# Altium PCB ECEN4720_brd1_2020-09-11.PcbDoc
Units mil, origin at the board's own origin, x right, y up, seen from the top; angles counter-clockwise.
Board outline 3500 x 2000 mil, 2 copper layers (Top Layer, Bottom Layer), stack 61.756 mil thick; 37 components, 23 nets, 95 pads, 26 vias.
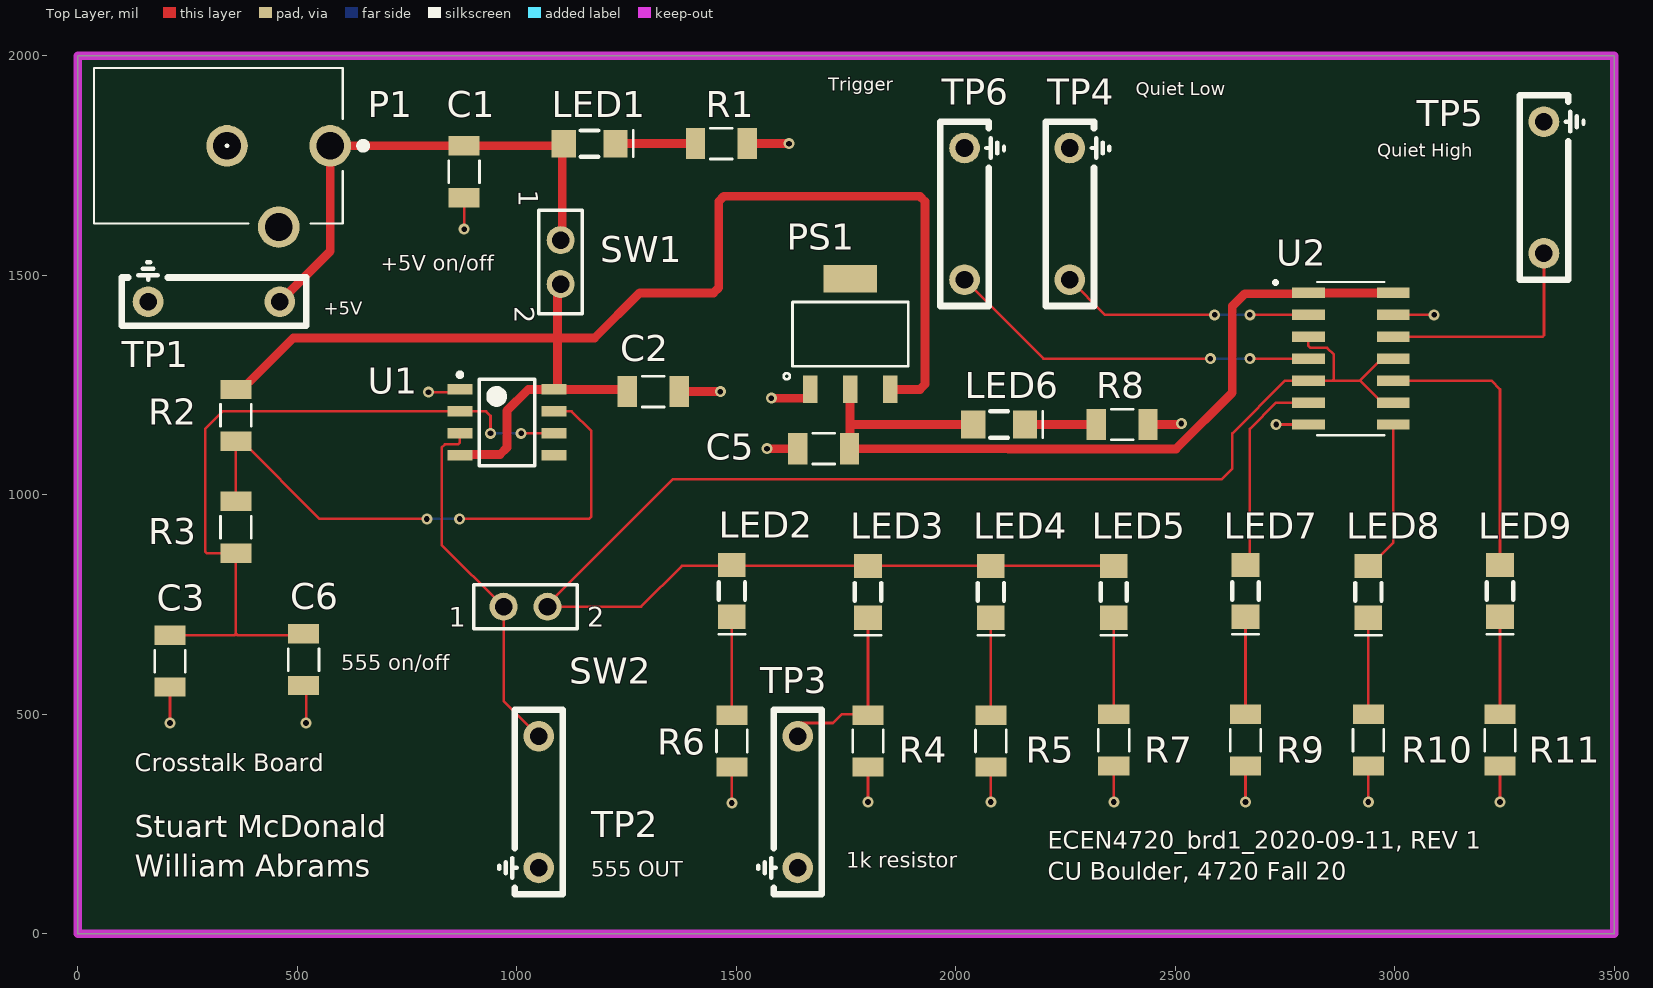
[diagram p0: Top Layer view]
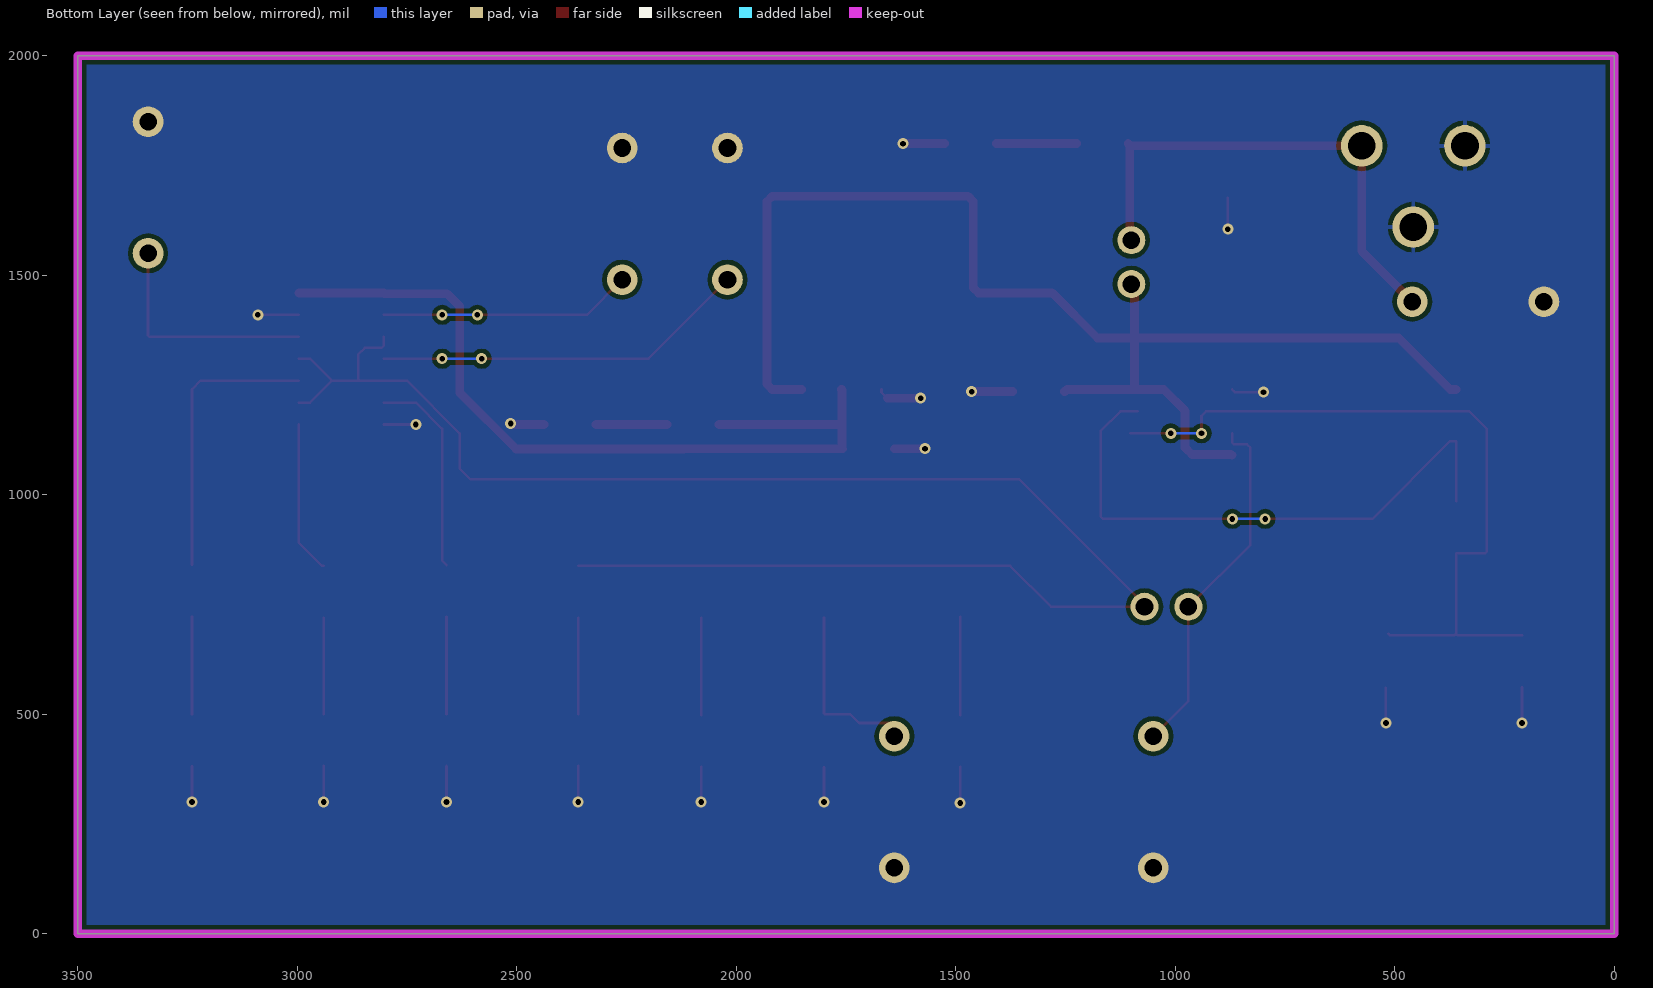
[diagram p1: Bottom Layer view, seen from below]

## Layer stack, top to bottom
Top Solder: solder mask 1, SM-001, Dk 4
Top Layer: signal copper 1.378
Dielectric 1: core 59, Core-043, Dk 4.3
Bottom Layer: signal copper 1.378
Bottom Solder: solder mask 1, SM-001, Dk 4

## Board outline
0,0 3500,0 3500,2000 0,2000

## Design rules (kind name [scope] priority, off if disabled: settings)
Clearance [All] p1: gap=10 ignorepadtopadclearanceinfootprint=FALSE except(0: Arc-Hole Track-Hole SMDPad-Hole THPad-Hole Via-Hole Fill-Hole Poly-Hole Region-Hole Text-Hole)
PlaneClearance [All] p1: clearance=10
PlaneConnect [All] p1: planeconnectstyle=Direct reliefexpansion=20 reliefentries=4 reliefconductorwidth=10 reliefairgap=10
PolygonConnect [All] p1: connectstyle=Direct reliefconductorwidth=10 reliefentries=4 polygonreliefangle="90 Angle" airgapwidth=10
RoutingVias [All] p1: holewidth=13 width=25 viastyle="Through Hole" minholewidth=13 minwidth=25 maxholewidth=60 maxwidth=80
SolderMaskExpansion [All] p1: expansion=4 istentingtop=FALSE
UnRoutedNet [All] p1: checkbadconnections=TRUE
Width "Schematic Width Constraint_2" [InNet('LDO_3.3V')] p1: maxlimit=100 minlimit=10 preferedwidth=20 minimp=50.000000 maximp=50.000000 favimp=50.000000
Width "Schematic Width Constraint_1" [InNet('+5')] p2: maxlimit=100 minlimit=10 preferedwidth=20 minimp=50.000000 maximp=50.000000 favimp=50.000000
Width "Schematic Width Constraint" [InNet('555_5v')] p3: maxlimit=100 minlimit=10 preferedwidth=20 minimp=50.000000 maximp=50.000000 favimp=50.000000
Width [All] p4: maxlimit=100 minlimit=6 preferedwidth=6 minimp=50.000000 maximp=50.000000 favimp=50.000000
27 further rules are at their usual default settings.

## Components (designator, comment, footprint, x,y, rotation, side; value= is the part's Value field where it differs from the comment)
C1 "22pF" 1206_Passive 880,1795 r270 top
C2 "22pF" 1206_Passive 1370,1235 r180 top
C3 "50nF" 1206_Passive 210,562 r90 top
C5 "22uF" 1206_Passive 1640,1105 r0 top
C6 "50nF" 1206_Passive 514.49,565.51 r90 top
LED1 "LTST-C150CKT" LED 1225,1800 r270 top value=Red
LED2 "LTST-C150CKT" LED 1490,722 r180 top value=Red
LED3 "LTST-C150CKT" LED 1800,720 r180 top value=Red
LED4 "LTST-C150CKT" LED 2080,720 r180 top value=Red
LED5 "LTST-C150CKT" LED 2360,720 r180 top value=Red
LED6 "LTST-C150CKT" LED 2158,1160 r270 top value=Red
LED7 "LTST-C150CKT" LED 2660,722 r180 top value=Red
LED8 "LTST-C150CKT" LED 2940,720 r180 top value=Red
LED9 "LTST-C150CKT" LED 3240,722 r180 top value=Red
P1 "Power Jack" Power_Jack 575,1795 r180 top value="CONN PWR JACK 2X5.5MM SOLDER"
PS1 "AZ1117CH-3.3TRG1" LDO 1760,1365 r180 top value="IC REG LINEAR 3.3V 800MA SOT223"
R1 "1k" 1206_Passive 1525,1800 r180 top value="1K Ohm"
R2 "10k" 1206_Passive 360,1122 r90 top value=10KOhm
R3 "10k" 1206_Passive 360,867 r90 top value=10KOhm
R4 "1k" 1206_Passive 1800,380 r90 top value="1K Ohm"
R5 "300" 1206_Passive 2080,380 r90 top value=300Ohm
R6 "1M" 1206_Passive 1490,380 r90 top value="10k Ohm"
R7 "1M" 1206_Passive 2360,382 r90 top value=50
R8 "1k" 1206_Passive 2438,1160 r180 top value="1K Ohm"
R9 "50" 1206_Passive 2660,382 r90 top value=50Ohm
R10 "50" 1206_Passive 2940,382 r90 top value=50Ohm
R11 "50" 1206_Passive 3240,382 r90 top value=50Ohm
SW1 "SW_2Pin_100mil_Switch" 2Pin-Header-Conn 1100,1580 r270 top
SW2 "SW_LED_Off/On" 2Pin-Header-Conn 970,745 r0 top
TP1 "TP_5V" TP10x_Probe 310,1440 r180 top
TP2 "TP_555_Output" TP10x_Probe 1050,300 r270 top
TP3 "TP_LED_current" TP10x_Probe 1640,300 r270 top
TP4 "TP_Quiet_Low" TP10x_Probe 2260,1640 r90 top
TP5 "TP_Quiet_High" TP10x_Probe 3340,1700 r90 top
TP6 "TP_Trigger" TP10x_Probe 2020,1640 r90 top
U1 "U_555_Fast" TS555IDTTR 870.43,1240 r0 top
U2 "Hex Inverter" HEX_74LVT14D 2900,1310 r0 top

## Footprints (in the part's own frame and the unit in brackets; to place one, negate y for a bottom-side part, rotate by r counter-clockwise, add the part's x,y. Pads: shape width x height; smd on the part's side, far side on the other; paste and mask are expansions set on the pad)
2Pin-Header-Conn [mm]
  round 1.62 hole 1.02: 1(0,0) 2(2.54,0)
  silkscreen extent -1.72,-1.27 4.26,1.26
1206_Passive [mil]
  rect 44x71 smd: 1(0,0) 2(118,0)
  silkscreen extent 34,-35 84,35
HEX_74LVT14D [mm]
  rect 1.9x0.6 smd: 1(-2.455,3.81) 2(-2.455,2.54) 3(-2.455,1.27) 4(-2.455,0) 5(-2.455,-1.27) 6(-2.455,-2.54) 7(-2.455,-3.81) 8(2.455,-3.81) 9(2.455,-2.54) 10(2.455,-1.27) 11(2.455,0) 12(2.455,1.27) 13(2.455,2.54) 14(2.455,3.81)
  silkscreen extent -4.45,-4.43 1.95,4.51
LDO [mil]
  rect 33x63 smd: 1(91,124.94) 2(0,124.94) 3(-91,124.94)
  rect 122x63 smd: 4(0,-127.06)
  silkscreen extent -132,-74 152,102
LED [mil]
  rect 63x55 smd: 1(0,0) 2(0,-118)
  silkscreen extent -30,-79 30,40
Power_Jack [mm]
  round 2.4 hole 1.6: 1(0,0) 2(5.969,0) 3(2.977,4.7)
  silkscreen extent -2.1,-4.5 13.68,4.5
TP10x_Probe [mil] "Small Probs footprint"
  round 70 hole 40: 1(-150,0) 2(150,0)
  silkscreen extent -210,-90 210,55
TS555IDTTR [mm] "IC OSC Single Timer 2.7MHz 8SOIC"
  rect 1.45x0.6 smd: 1(0,0) 2(0,-1.27) 3(0,-2.54) 4(0,-3.81) 5(5.45,-3.81) 6(5.45,-2.54) 7(5.45,-1.27) 8(5.45,0)
  silkscreen extent -0.12,-4.41 4.33,0.97

## Part data
C1 C2: library part C_22pF_1206, "22pF ±5% 16V Ceramic Capacitor C0G, NP0 1206 (3216 Metric)", Digikey Link=https://www.digikey.com/product-detail/en/885012008011/732-7867-1-ND/5454494/?itemSeq=304982362, Digikey Part=732-7867-1-ND
C3 C6: library part C_50nF_1206, "50nF ±5% 16V Ceramic Capacitor C0G, NP0 1206 (3216 Metric)", Digikey Link=https://www.digikey.com/product-detail/en/885012008011/732-7867-1-ND/5454494/?itemSeq=304982362, Digikey Part=732-7867-1-ND
C5: library part C_22uF_1206, "22µF ±20% 16V Ceramic Capacitor X5R 1206 (3216 Metric)", Digikey Link=https://www.digikey.com/product-detail/en/CL31A226MOCLNNC/1276-2728-1-ND/3890814/?itemSeq=304982363, Digikey Part=1276-2728-1-ND
LED1 LED2 LED3 LED4 LED5 LED6 LED7 LED8 LED9: library part LED_RED_1206, "Red 638nm LED Indication - Discrete 1.8V 1206 (3216 Metric)", Digikey Link=https://www.digikey.com/product-detail/en/LTST-C150CKT/160-1167-1-ND/269239/?itemSeq=304982368, Digikey Part=160-1167-1-ND
P1: library part "P_Power Jack", "Power Barrel Connector Jack 2.10mm ID (0.083\"), 5.50mm OD (0.217\") Through Hole, Right Angle", Digikey Link=https://www.digikey.com/product-detail/en/PJ-102A/CP-102A-ND/275425/?itemSeq=304982367, Digikey Part=CP-102A-ND
PS1: library part PS_LDO_3v3, "Linear Voltage Regulator IC Positive Fixed 1 Output 1A SOT-223", Digikey Link=https://www.digikey.com/product-detail/en/AZ1117CH-3.3TRG1/AZ1117CH-3.3TRG1DICT-ND/4505206/?itemSeq=304982370, Digikey Part=AZ1117CH-3.3TRG1DICT-ND
R1 R4 R8: library part R_1K_1206, "1 kOhms ±1% 0.5W, 1/2W Chip Resistor 1206 (3216 Metric) Anti-Sulfur, Moisture Resistant Thin Film", Digikey Link=https://www.digikey.com/product-detail/en/RNCP1206FTD1K00/RNCP1206FTD1K00CT-ND/2240675/?itemSeq=304982373, Digikey Part=RNCP1206FTD1K00CT-ND
R2 R3: library part R_10KOhm_1206, "10 kOhms ±5% 0.25W, 1/4W Chip Resistor 1206 (3216 Metric) Automotive AEC-Q200 Thick Film", Digikey Link=https://www.digikey.com/product-detail/en/RMCF1206JT300R/RMCF1206JT300RCT-ND/1942776/?itemSeq=304982374, Digikey Part=RMCF1206JT300RCT-ND
R5: library part R_300Ohm_1206, "300 Ohms ±5% 0.25W, 1/4W Chip Resistor 1206 (3216 Metric) Automotive AEC-Q200 Thick Film", Digikey Link=https://www.digikey.com/product-detail/en/RMCF1206JT300R/RMCF1206JT300RCT-ND/1942776/?itemSeq=304982374, Digikey Part=RMCF1206JT300RCT-ND
R6 R7: library part R_1M_1206, "1 MOhms ±5% 0.25W, 1/4W Chip Resistor 1206 (3216 Metric) Automotive AEC-Q200 Thick Film", Digikey Link=https://www.digikey.com/product-detail/en/RMCF1206JT1M00/RMCF1206JT1M00CT-ND/1942830/?itemSeq=304982358, Digikey Part="Number RMCF1206JT1M00CT-ND"
R9 R10 R11: library part R_50Ohm_1206, "50 Ohms ±5% 0.25W, 1/4W Chip Resistor 1206 (3216 Metric) Automotive AEC-Q200 Thick Film", Digikey Link=https://www.digikey.com/product-detail/en/RMCF1206JT300R/RMCF1206JT300RCT-ND/1942776/?itemSeq=304982374, Digikey Part=RMCF1206JT300RCT-ND
SW1: "2Pin Header"
SW2: library part SW_2Pin_100mil_Switch, "2Pin Header"
TP1 TP2 TP3 TP4 TP5 TP6: library part TP_10x_Probe, "Test Point 300 mil centers"
U1: "555 Type, Timer/Oscillator _Single_ IC 2.7MHz 8-SO", Package="SO-8 STMicroelectronics", Availability=Unavailable, DigiKey-Purchase-URL=https://snapeda.com/shop?store=DigiKey&id=1050007, MF=STMicroelectronics, MP=TS555IDTTR, Price=None, SnapEDA_Link=https://www.snapeda.com/parts/TS555IDTTR/STMicroelectronics/view-part/1050007/?ref=snap
U2: library part U_7414_LVTD_Hex, "Inverter IC 6 Channel Schmitt Trigger 14-SOIC", ComponentLink1Description="New link", Supplier 1=Digi-Key

## Via types
v1: diameter 25, hole 13, Top Layer to Bottom Layer, 26 vias

## Nets (pads, with @x,y where several pads share a name; then routed paths per layer and width w, separated by ;. In a path a pad name is that pad's centre, name@x,y a point inside that pad or via, vN(x,y) a via of type N, cw(c..) or ccw(c..) an arc to the next point about the centre after c; other vN are vias at no path point)
"555 out": LED2.2 LED3.2 LED4.2 LED5.2 SW2.2 U2.3 U2.5 U2.9 U2.11 | length 3783.3
  Top Layer w6: LED5.2 LED4.2 LED3.2 1520,838 1480,838 1380,838 1376,838 1283,745 SW2.2 1070,750 1355,1035 2605,1035 2630,1060 2630,1140 2750,1260 U2.5 2858,1260 ; U2.3 2803.35,1339.19 2807.72,1334.81 2846.13,1334.81 2861.51,1319.43 2861.51,1263.51 2858,1260 ; U2.9 2971.06,1210 2921.06,1260 ; U2.11 2971.06,1310 2921.06,1260 ; 2858,1260 2921.06,1260
555_5v: C2.2 PS1.3 R2.2 SW1.2 U1.4 U1.8 | length 3105.6
  Top Layer w20: R2.2 373.5,1240 490.66,1357.16 1092.5,1357.16 ; U1.4 872.24,1091.81 961.81,1091.81 977.5,1107.5 977.5,1191.04 1026.46,1240 U1.8 ; SW1.2 1092.5,1472.5 1092.5,1357.16 ; C2.2 1247,1240 1090.69,1240 1092.5,1241.81 1092.5,1357.16 ; PS1.3 1851.06,1240 1918.28,1240 1930,1251.72 1930,1668.28 1918.28,1680 1471.72,1680 1460,1668.28 1460,1471.72 1448.28,1460 1280,1460 1177.16,1357.16 1092.5,1357.16
555_D: R2.1 R3.2 U1.7 | length 1321
  Top Layer w6: R3.2 R2.1 373.5,1122 550.5,945 v1(795,945) ; v1(870,945) 1165,945 1170,950 1170,1145 1125,1190 U1.7
  Bottom Layer w6: v1(795,945) v1(870,945)
+5: C1.1 LED1.2 P1.1 SW1.1 TP1.1 | length 1154.7
  Top Layer w20: TP1.1 575,1555 P1.1 C1.1 1102,1795 LED1.2@1103.5,1796.5 ; SW1.1 1103.5,1583.5 LED1.2@1103.5,1796.5 ; LED1.2 LED1.2@1103.5,1796.5
GND: C1.2 C2.1 C3.1 C5.1 C6.1 P1.2 P1.3 PS1.1 R1.1 R4.1 R5.1 R6.1 R7.1 R8.1 R9.1 R10.1 R11.1 TP1.2 TP2.2 TP3.2 TP4.2 TP5.2 TP6.2 U1.1 U2.7 U2.13 | length 1481.6
  Top Layer w6: v1(210,480) C3.1 ; v1(520,480) C6.1@520,560 ; v1(798.89,1233.72) 864.16,1233.72 U1.1 ; v1(880,1605) C1.2 ; v1(1490,298) R6.1 ; PS1.1@1655.5,1220 1669,1233.5 PS1.1 ; v1(1800,300) R4.1 ; v1(2080,300) R5.1 ; v1(2360,300) R7.1 ; v1(2660,300) R9.1 ; v1(2730,1160) U2.7 ; v1(2940,300) R10.1 ; U2.13 v1(3090,1410) ; v1(3240,300) R11.1
  Top Layer w20: C2.1 v1(1463.65,1235) ; R1.1 v1(1620,1800) ; v1(1570,1105) C5.1 ; v1(1580,1220) PS1.1@1655.5,1220 ; R8.1 2510.11,1160 2512.61,1162.5 v1(2513.96,1162.5)
LDO_3.3V: C5.2 LED6.2 PS1.2 U2.1 U2.14 | length 1918.7
  Top Layer w20: PS1.2 1759,1239.06 1759,1160 ; LED6.2 1759,1160 ; U2.14 U2.1 2801.54,1458.19 2658.19,1458.19 2629.79,1429.79 2629.79,1232.37 2501.93,1104.5 2119.39,1104.5 2118.89,1105 C5.2 1759,1106 1759,1160
NetC3_2: C3.2 C6.2 R3.1 U1.2 U1.6 | length 1715.7
  Top Layer w6: C3.2 356.49,680 360,683.51 ; C6.2 510.97,680 363.51,680 360,683.51 ; v1(940,1140) 940,1180 930,1190 U1.2 330,1190 290,1150 290,870.51 293.51,867 R3.1 360,683.51 ; v1(1010,1140) U1.6 U1.6@1101.73,1140
  Bottom Layer w6: v1(940,1140) v1(1010,1140)
NetLED1_1: LED1.1 R1.2 | length 182
  Top Layer w20: LED1.1 R1.2
NetLED2_1: LED2.1 R6.2 | length 224
  Top Layer w6: R6.2 LED2.1
NetLED3_1: LED3.1 R4.2 TP3.1 | length 387.1
  Top Layer w6: TP3.1@1640,480 1720,480 1740,500 1798,500 1800,502 LED3.1
NetLED4_1: LED4.1 R5.2 | length 222
  Top Layer w6: R5.2 LED4.1
NetLED5_1: LED5.1 R7.2 | length 220
  Top Layer w6: R7.2 LED5.1
NetLED6_1: LED6.1 R8.2 | length 162
  Top Layer w20: LED6.1 R8.2
NetLED7_1: LED7.1 R9.2 | length 222
  Top Layer w6: R9.2 LED7.1
NetLED7_2: LED7.2 U2.6 | length 472.3
  Top Layer w6: LED7.2 2670,850 2670,1150 2730,1210 U2.6
NetLED8_1: LED8.1 R10.2 | length 220
  Top Layer w6: R10.2 LED8.1
NetLED8_2: LED8.2 U2.8 | length 347.8
  Top Layer w6: LED8.2 2944,838 2996.65,890.65 U2.8
NetLED9_1: LED9.1 R11.2 | length 222
  Top Layer w6: R11.2 LED9.1
NetLED9_2: LED9.2 U2.10 | length 651.6
  Top Layer w6: U2.10 3220,1260 3240,1240 LED9.2
NetSW2_1: SW2.1 TP2.1 U1.3 | length 816.1
  Top Layer w6: U1.3 870.43,1119.19 866.06,1114.81 836.51,1114.81 828.89,1107.2 828.89,886.11 SW2.1 970,530 TP2.1
NetTP4_1: TP4.1 U2.2 | length 576.5
  Top Layer w6: TP4.1 2340,1410 v1(2590,1410) ; v1(2670,1410) U2.2
  Bottom Layer w6: v1(2590,1410) v1(2670,1410)
NetTP5_1: TP5.1 U2.12 | length 531.3
  Top Layer w6: U2.12 3336.49,1360 3340,1363.51 TP5.1
NetTP6_1: TP6.1 U2.4 | length 857.9
  Top Layer w6: TP6.1 2200,1310 v1(2580,1310) ; v1(2670,1310) U2.4
  Bottom Layer w6: v1(2580,1310) v1(2670,1310)
pads on no net: PS1.4 U1.5

## Polygon pours and split planes (outlines as drawn)
GND on Bottom Layer "GND_L02_P000" (solid, pour order 0): 0,2000 3500,2000 3500,0 0,0

## Keep-outs
Keep-Out Layer:
  the board outline again, w20

## Silkscreen, mask and mechanical layers (free items; w line width, h text height)
Top Overlay:
  text "Trigger" at 1710,1920 h30
  text "Quiet Low" at 2410,1910 h30
  text "Quiet High" at 2960,1770 h30
  text "+5V on/off" at 690,1510 h35
  text "+5V" at 560,1410 h30
  text "555 on/off" at 600,600 h35
  text "Crosstalk Board" at 130,370 h40
  text "Stuart McDonald" at 130,220 h50
  text "ECEN4720_brd1_2020-09-11, REV 1" at 2210,193.33 h40
  text "1k resistor" at 1750,150 h35
  text "William Abrams" at 130,130 h50
  text "555 OUT" at 1170,130 h35
  text "CU Boulder, 4720 Fall 20" at 2210,123.33 h40

## Text inside footprints (layer, text, board x,y; h text height)
SW1: Top Overlay "1" at 990,1695 h77.5 r270; Top Overlay "2" at 980,1430 h77.5 r270; Mechanical 16 "1" at 1075,1701.65 h77.5 r270; Mechanical 16 "2" at 1075,1398.86 h77.5 r270
SW2: Top Overlay "1" at 845,685 h77.5; Top Overlay "2" at 1160,685 h77.5; Mechanical 16 "1" at 848.35,720 h77.5; Mechanical 16 "2" at 1151.14,720 h77.5